# Altium PCB MSXIV_DC-DC_Converter.PcbDoc (part 2 of 2)
Units mm, origin at the board's own origin, x right, y up, seen from the top; angles counter-clockwise.
Board outline 196.53 x 66.51 mm, 2 copper layers (Top Layer, Bottom Layer); 69 components, 35 nets, 204 pads, 127 vias.
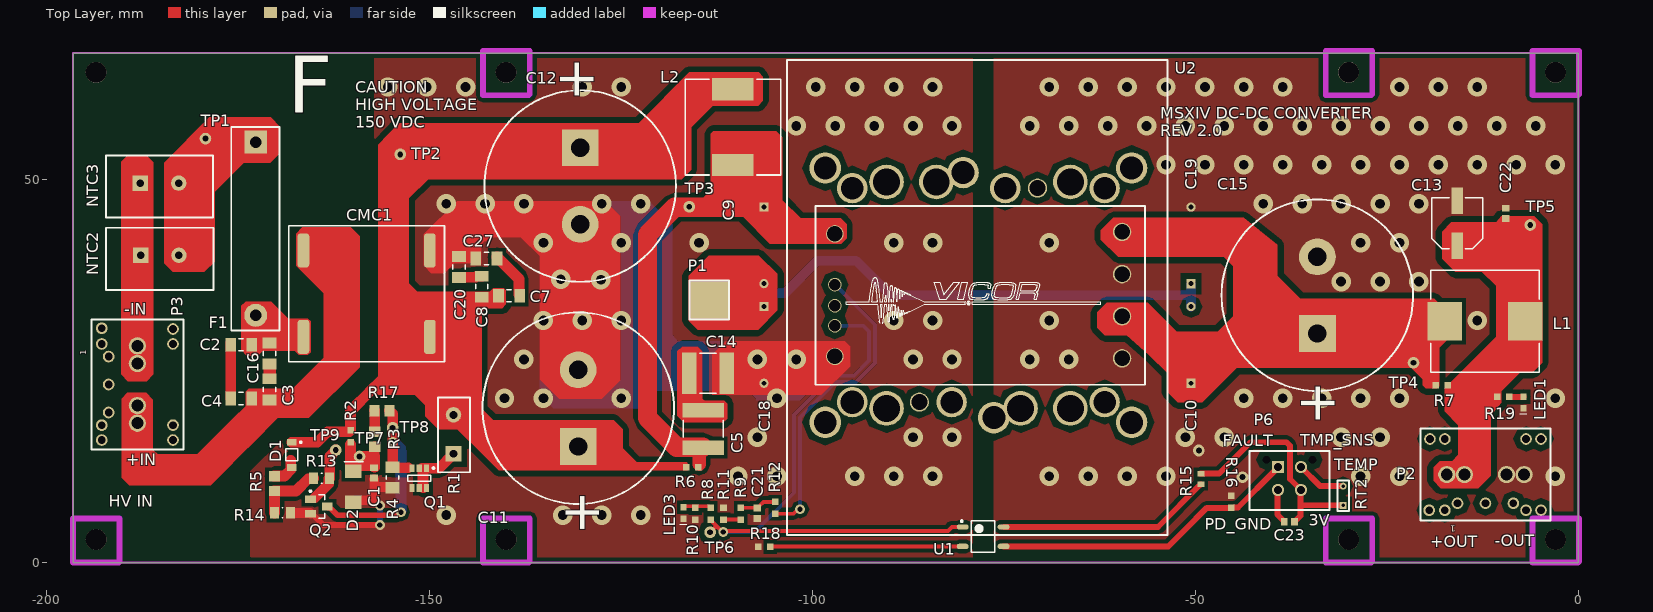
[diagram p0: Top Layer view]

## Via types
v1: diameter 2.54, hole 1.27, Top Layer to Bottom Layer, tented both sides, 119 vias
v2: diameter 1.27, hole 0.711, Top Layer to Bottom Layer, tented both sides, 6 vias
v3: diameter 1.524, hole 0.762, Top Layer to Bottom Layer, tented both sides, 2 vias

## Nets (pads, with @x,y where several pads share a name; then routed paths per layer and width w, separated by ;. In a path a pad name is that pad's centre, name@x,y a point inside that pad or via, vN(x,y) a via of type N, cw(c..) or ccw(c..) an arc to the next point about the centre after c; other vN are vias at no path point) (continued)
NetC21_1: C21.1 R9.1 R12.1 | length 4.9
  Top Layer w0.508: R9.1 C21.1@-107.188,7.152 ; C21.1 -107.138,7.127 -106.942,7.323 -106.942,7.373 -106.387,7.927 R12.1
NetD1_2: D1.2 R5.2 | length 3.7
  Top Layer w1.397: R5.2 -170.233,11.311 -168.941,11.311 -168.123,12.129 -168.123,13.351
NetF1_1: F1.1 NTC2.2 NTC3.2 TP1.TH_TP
NetLED1_1: LED1.1 R19.2 | length 1.9
  Top Layer w0.762: R19.2 -9.03,21.628 -7.19,21.628 LED1.1
NetLED3_1: LED3.1 R8.2 R10.1 | length 3.6
  Top Layer w0.508: LED3.1@-116.811,7.352 -115.311,7.352 -113.536,7.352 R8.2
NetQ1_1: Q1.1 Q1.2 Q1.5 Q1.6 R1.1 | length 7.4
  Top Layer w1.397: -150.8,9.779 -150.8,10.211 -150.851,10.262 -150.851,12.217 -150.927,12.294 -150.897,12.324 Q1.1 -148.738,12.324 R1.1
NetQ1_3: Q1.3 Q2.3 R4.1 R17.1 TP8.TH_TP | length 29.4
  Top Layer w0.762: Q2.3 -163.221,7.196 -163.021,7.196 -161.997,6.172 -154.265,6.172 -153.858,6.579 v2(-153.721,6.579)
  Top Layer w1.397: R17.1 -155.219,19.809 -154.813,19.403 v2(-154.813,15.773) R4.1 -154.761,12.373 -152.785,12.373 -152.781,12.37
  Bottom Layer w1.397: v2(-154.813,15.773) -154.635,15.773 -153.746,14.884 -153.746,14.503 -153.721,14.478 v2@-153.721,6.773
NetQ2_1: Q2.1 R13.1 TP9.TH_TP | length 7.4
  Top Layer w1.397: Q2.1@-164.971,8.464 -163.132,10.303 -163.132,10.947 -163.081,10.998 R13.1 -163.034,13.843 -162.23,14.647 TP9.TH_TP
NetR3_1: R3.1 R17.2 | length 2.8
  Top Layer w1.397: R17.2 -157.16,19.802 -157.16,17.079 R3.1
NetR5_1: R5.1 R13.2 R14.2 | length 8.7
  Top Layer w1.397: R5.1 R5.1@-170.254,9.337 ; R14.2 -170.231,9.314 R5.1@-170.254,9.337 ; R13.2 -165.186,10.947 -165.826,10.947 -167.436,9.337 R5.1@-170.254,9.337
NetR8_1: R8.1 TP6.TH_TP U1.1 U2.D1 | length 77.9
  Top Layer w0.508: TP6.TH_TP -113.337,3.962 -112.517,4.782 ; R8.1 -112.517,4.782 ; U1.1 -81.794,4.648 -82.327,4.115 -111.595,4.115 -111.722,3.988 -112.517,4.782
  Bottom Layer w0.508: v2(-111.658,3.988) -107.544,3.988 -102.413,9.119 -102.413,19.25 -97.275,24.388 -94.58,24.388 -92.606,26.362 -92.606,30.181 -93.333,30.908 U2.D1
NetR9_2: R9.2 R11.2 | length 2
  Top Layer w0.508: R11.2@-111.366,5.602 R9.2
NetR12_2: R12.2 U2.B1 | length 40.6
  Top Layer w0.508: R12.2 -102.487,6.377 -101.905,6.96 v2(-101.625,6.96)
  Bottom Layer w0.508: v2(-101.625,6.96) -101.625,18.96 -97.005,23.58 -94.31,23.58 -91.844,26.046 -91.844,31.049 U2.B1
NetR15_1: R15.1 U1.4 | length 28.1
  Top Layer w0.762: U1.4 -54.899,4.648 -49.339,10.208 R15.1
NetR18_1: R18.1 U1.2 | length 25.2
  Top Layer w0.508: R18.1@-105.578,2.108 U1.2
REAR_PWR_GND: C23.2 P6.2 | length 4.6
  Top Layer w0.762: P6.2 -39.294,9.409 -39.294,6.253 -38.404,5.363 C23.2
pads on no net: P2.0 P3.0 P6. U2. U2.C1

## Polygon pours and split planes (outlines as drawn)
GND on Top Layer "Top Layer-GND" (solid, remove dead copper, pour order 8): 0,66.408 -76.333,66.408 -76.333,0 0,0
BULK_CAP_NEG on Top Layer "Top Layer-HV_GND" (solid, remove dead copper, pour order 4): -157.226,66.408 -157.226,23.876 -163.621,17.481 -167.798,17.47 -173.368,11.9 -173.381,0 -156.667,0 -79.083,0 -79.083,66.408
BULK_CAP_NEG on Bottom Layer "Top Layer-HV_GND" (solid, pour order 11): -156.745,66.174 -156.745,23.824 -163.321,17.248 -167.875,17.235 -173.445,11.665 -173.458,-0.234 -156.745,-0.234 -79.16,-0.234 -79.16,66.174
GND on Bottom Layer "Bottom Layer-GND" (solid, remove dead copper, pour order 10): 0,66.408 -76.333,66.408 -76.333,0 0,0

## Keep-outs
Keep-Out Layer:
  lines w0.254: -196.53,0 0,0 0,66.508 -196.53,66.508 -196.53,0
  lines w0.762: -137.047,0 -143,0 -143,5.766 -136.92,5.766 -136.92,0.127 ; -137.047,61.008 -143,61.008 -143,66.774 -136.92,66.774 -136.92,61.135 ; -27.047,0 -33,0 -33,5.766 -26.92,5.766 -26.92,0.127 ; -27.047,61.008 -33,61.008 -33,66.774 -26.92,66.774 -26.92,61.135 ; -0.047,0 -6,0 -6,5.766 0.08,5.766 0.08,0.127 ; -0.047,61.008 -6,61.008 -6,66.774 0.08,66.774 0.08,61.135 ; -196.53,0 -196.53,5.766 -190.449,5.766 -190.449,0.127 -190.576,0 -196.53,0

## Other copper
Top Layer:
  region net CHOKE_NEG: -186.969,22.149 -186.106,21.285 -186.106,14.757 -185.496,14.148 -180.289,14.148 -175.606,18.831 -172.723,15.948 -178.587,10.084 -189.179,10.084 -190.17,11.074 -190.17,21.412 -189.433,22.149
  region net HV_POS: -186.919,53.137 -186.055,52.273 -186.055,24.587 -186.944,23.698 -189.382,23.698 -190.246,24.562 -190.246,52.349 -189.459,53.137
  region: 5.283,22.885
  region net NetC13_1: -17.475,20.879 -17.475,19.736 -15.684,17.944 -15.684,14.058 -16.509,13.233 -18.136,13.233 -18.923,12.446 -18.923,10.693 -17.958,9.728 -13.106,9.728 -11.481,11.354 -11.481,19.228 -10.058,20.879
  region net BULK_CAP_POS: -116.078,63.983 -122.707,57.353 -122.707,50.165 -122.58,50.038 -117.069,50.038 -115.849,51.257 -115.849,56.82 -113.005,59.665 -107.086,59.665 -106.477,60.274 -106.477,63.449 -107.01,63.983
  region net NetC13_1: -10.055,45.187 -5.766,45.187 -4.75,44.171 -4.75,26.06 -5.918,24.892 -7.544,24.892 -10.055,22.38 -10.055,20.856 -17.475,20.88 -17.475,22.733 -10.758,29.45 -10.758,36.108 -12.598,37.948 -16.078,37.948 -17.805,39.675 -17.805,43.18 -16.586,44.399 -10.758,44.399
  region net NetC5_1: -112.954,56.337 -113.309,55.982 -113.309,50.749 -113.309,49.378 -113.309,48.537 -114.172,47.675 -109.055,45.123 -105.562,41.631 -96.266,41.631 -95.555,42.342 -95.555,44.171 -96.317,44.933 -101.549,44.933 -103.937,47.32 -103.937,55.524 -104.75,56.337
  region: -112.039,59.741
  region net BULK_CAP_POS: -122.707,57.353 -121.361,56.007 -121.361,51.257 -122.58,50.038 -150.19,50.038 -152.679,47.549 -152.679,36.449 -151.604,35.373 -142.156,35.373 -141.69,35.839 -140.335,35.839 -140.03,35.535 -140.03,33.703 -140.51,33.223 -142.596,33.223 -143.205,32.614 -143.205,20.091 -141.707,18.593 -125.933,18.593 -124.765,17.424 -124.765,14.924 -122.968,13.081 -116.434,13.081 -116.219,12.866 -116.219,12.192 -116.371,12.04 -125.933,12.04 -140.97,12.04 -142.85,13.919 -146.355,17.424 -148.869,17.424 -150.571,19.126 -150.571,20.55 -151.916,21.895 -156.074,21.895 -158.357,22.695 -156.718,24.333 -156.718,54.534 -154.012,57.353
  region net NetC5_2: -117.018,28.194 -114.986,28.194 -114.376,27.584 -114.376,21.412 -114.071,21.107 -111.531,21.107 -111.15,20.726 -111.15,18.796 -111.709,18.237 -111.811,18.339 -116.815,18.339 -117.627,19.152 -117.627,27.584
  region net NetF1_1: -184.658,39.091 -183.515,37.948 -179.375,37.948 -178.054,39.268 -178.054,48.412 -174.269,52.197 -170.79,52.197 -169.545,53.442 -169.545,56.921 -170.739,58.115 -178.765,58.115 -184.658,52.222
  region net BULK_CAP_NEG: -150.759,42.829 -146.39,47.198 -127.055,47.198 -125.095,45.237 -125.095,23.8 -127.533,21.361 -133.045,21.361 -135.595,23.911 -135.595,40.035 -138.059,42.499 -142.123,42.499 -142.669,41.952 -150.759,41.952
  region net BULK_CAP_NEG: -149.713,43.874 -150.759,42.829 -150.759,38.79 -149.743,37.774 -148.066,37.774 -148.066,37.8 -146.771,39.095 -143.231,39.095 -143.231,41.529 -142.342,42.42
  region net CHOKE_NEG: -166.613,43.743 -167.41,42.946 -167.41,38.754 -166.278,37.622 -163.805,35.148 -163.805,26.746 -167.864,22.687 -170.469,22.687 -170.469,18.923 -165.735,18.923 -159.131,25.527 -159.131,42.616 -160.258,43.743
  region net CHOKE_NEG: -174,22.28 -174,20.426 -175.6,18.826 -175.6,17.653 -177.825,14.99 -173.681,14.99 -169.326,19.345 -169.326,22.077 -169.936,22.687 -173.593,22.687
  region net CHOKE_POS: -174.558,33.493 -173.99,34.061 -170.663,34.061 -168.432,31.831 -165.866,31.831 -165.532,31.496 -165.532,27.483 -165.862,27.153 -167.081,27.153 -167.594,27.665 -171.79,27.665 -172.425,27.03 -173.847,27.03 -174.588,27.771
  region net BULK_CAP_NEG: -111.333,28.908 -113.083,27.158 -113.083,21.908 -107.833,21.908 -98.833,21.908 -95.083,25.658 -95.083,28.179 -95.812,28.908 -100.083,28.908
  region net NetC10_1: -60.757,44.983 -62.333,43.408 -62.333,42.158 -60.078,39.903 -46.328,39.903 -45.083,38.658 -45.083,32.158 -47.083,30.158 -52.459,30.158 -56.209,33.908 -61.583,33.908 -62.833,32.658 -62.833,30.658 -61.833,29.658 -58.94,29.658 -56.083,27.158 -53.583,24.658 -53.583,22.158 -52.333,20.908 -49.083,20.908 -44.583,25.408 -21.833,25.408 -20.333,23.908 -20.333,23.147 -19.923,22.737 -18.503,22.737 -18.196,23.044 -18.196,28.044 -16.256,29.985 -16.256,31.831 -18.833,34.408 -36.288,34.408 -39.319,37.44 -39.319,41.509 -43.699,44.983
  region net EMI_GND: -113.534,40.086 -116.164,37.455 -116.164,31.577 -114.97,30.383 -107.108,30.383 -104.583,32.908 -104.583,37.679 -106.989,40.086
Bottom Layer:
  region net BULK_CAP_NEG: -133.583,47.158 -135.583,45.158 -135.583,21.908 -133.833,20.158 -122.833,20.158 -120.583,22.408 -108.333,22.408 -107.333,21.408 -107.333,21.158 -101.583,21.158 -97.583,25.158 -96.083,25.158 -95.083,26.158 -95.083,28.158 -95.833,28.908 -117.614,28.908 -118.333,29.729 -118.333,44.158 -121.333,47.158

## Silkscreen, mask and mechanical layers (free items; w line width, h text height)
Top Overlay:
  text "CAUTION / HIGH VOLTAGE / 150 VDC" at -159.674,56.748 h1.52
  text "F" at -168.488,56.367 h12.7
  text "MSXIV DC-DC CONVERTER / REV 2.0" at -54.583,55.658 h1.52
  text "-IN" at -189.84,32.334 h1.52
  text "TMP_SNS" at -36.347,15.265 h1.52
  text "FAULT" at -46.457,15.189 h1.52
  text "+IN" at -189.56,12.675 h1.52
  text "TEMP" at -31.852,12.065 h1.52
  text "HV IN" at -191.846,7.264 h1.52
  text "3V" at -35.23,4.826 h1.52
  text "PD_GND" at -48.819,4.293 h1.52
  text "-OUT" at -10.947,2.134 h1.52
  text "+OUT" at -19.329,2.007 h1.52
Bottom Overlay:
  drawing of 32 lines, arcs and shapes, not listed

## Text inside footprints (layer, text, board x,y; h text height)
C11: Top Overlay "+" at -127.833,3.658 h5 r90
C12: Top Overlay "+" at -132.933,65.958 h5 r270
C15: Top Overlay "+" at -31.833,17.908 h5 r90
P2: Top Overlay "1" at -15.991,4.831 h0.8 r180
P3: Top Overlay "1" at -194.788,27.091 h0.8 r90